# Altium PCB 凌霄核心板插座PCB.PcbDoc
Units mil, origin at the board's own origin, x right, y up, seen from the top; angles counter-clockwise.
Board outline 6000 x 4000 mil, 2 copper layers (Top Layer, Bottom Layer); 1 components, 0 nets, 72 pads, 0 vias.
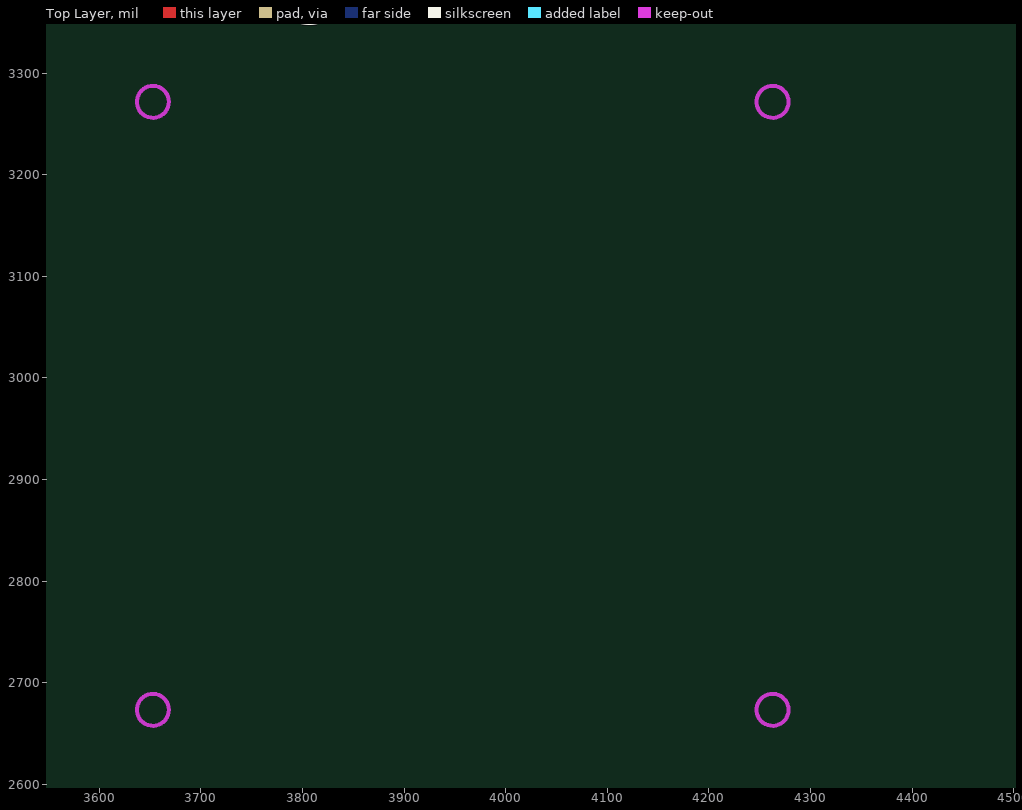
[diagram p0: Top Layer view]
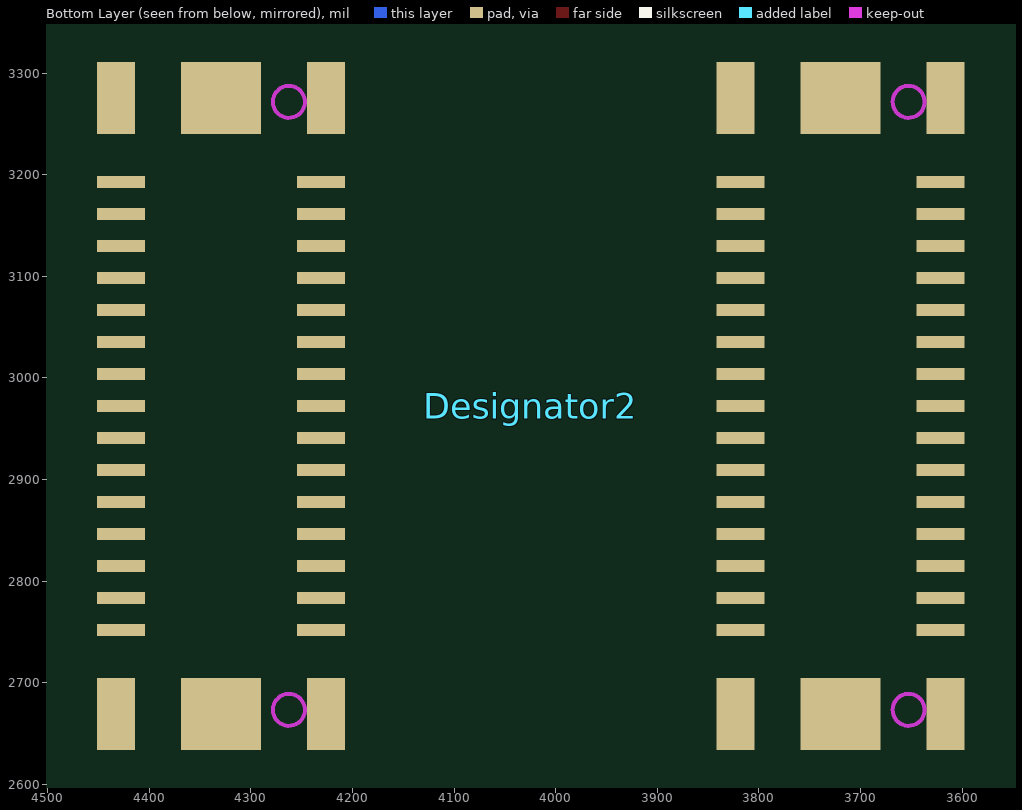
[diagram p1: Bottom Layer view, seen from below]

## Layer stack, top to bottom
Top Solder: solder mask 0.4, Solder Resist, Dk 3.5
Top Layer: signal copper 1.4
Dielectric 1: dielectric 12.6, FR-4, Dk 4.8
Bottom Layer: signal copper 1.4
Bottom Solder: solder mask 0.4, Solder Resist, Dk 3.5

## Board outline
1000,1000 7000,1000 7000,5000 1000,5000

## Design rules (kind name [scope] priority, off if disabled: settings)
Clearance [All] p1: gap=10 ignorepadtopadclearanceinfootprint=FALSE except(0: Arc-Hole Track-Hole SMDPad-Hole THPad-Hole Via-Hole Fill-Hole Poly-Hole Region-Hole Text-Hole)
PolygonConnect [All] p1: connectstyle=Relief reliefconductorwidth=10 reliefentries=4 polygonreliefangle="90 Angle" airgapwidth=10
RoutingVias [All] p1: holewidth=28 width=50 viastyle="Through Hole" minholewidth=28 minwidth=50 maxholewidth=28 maxwidth=50
SolderMaskExpansion [All] p1: expansion=4
Width [All] p1: maxlimit=10 minlimit=10 preferedwidth=10
30 further rules are at their usual default settings.

## Components (designator, comment, footprint, x,y, rotation, side; value= is the part's Value field where it differs from the comment)
Designator2 "Comment" AnoFcMolex_MainBoard 4035,2970 r0 top

## Footprints (in the part's own frame and the unit in brackets; to place one, negate y for a bottom-side part, rotate by r counter-clockwise, add the part's x,y. Pads: shape width x height; smd on the part's side, far side on the other; paste and mask are expansions set on the pad)
AnoFcMolex_MainBoard [mm]
  rect 0.95x1.8 smd far side: 0(-10.637,-7.636) 0(-10.637,7.764) 0(-5.387,-7.636) 0(-5.387,7.764) 0(4.857,-7.636) 0(4.857,7.764) 0(10.107,-7.636) 0(10.107,7.764)
  rect 2x1.8 smd far side: 0(-8.012,-7.636) 0(-8.012,7.764) 0(7.482,-7.636) 0(7.482,7.764)
  rect 1.2x0.3 smd far side: 1(-10.512,5.664) 2(-10.512,4.864) 3(-10.512,4.064) 4(-10.512,3.264) 5(-10.512,2.464) 6(-10.512,1.664) 7(-10.512,0.864) 8(-10.512,0.064) 9(-10.512,-0.736) 10(-10.512,-1.536) 11(-10.512,-2.336) 12(-10.512,-3.136) 13(-10.512,-3.936) 14(-10.512,-4.736) 15(-10.512,-5.536) 16(-5.512,-5.536) 17(-5.512,-4.736) 18(-5.512,-3.936) 19(-5.512,-3.136) 20(-5.512,-2.336) 21(-5.512,-1.536) 22(-5.512,-0.736) 23(-5.512,0.064) 24(-5.512,0.864) 25(-5.512,1.664) 26(-5.512,2.464) 27(-5.512,3.264) 28(-5.512,4.064) 29(-5.512,4.864) 30(-5.512,5.664) 31(4.982,5.664) 32(4.982,4.864) 33(4.982,4.064) 34(4.982,3.264) 35(4.982,2.464) 36(4.982,1.664) 37(4.982,0.864) 38(4.982,0.064) 39(4.982,-0.736) 40(4.982,-1.536) 41(4.982,-2.336) 42(4.982,-3.136) 43(4.982,-3.936) 44(4.982,-4.736) 45(4.982,-5.536) 46(9.982,-5.536) 47(9.982,-4.736) 48(9.982,-3.936) 49(9.982,-3.136) 50(9.982,-2.336) 51(9.982,-1.536) 52(9.982,-0.736) 53(9.982,0.064) 54(9.982,0.864) 55(9.982,1.664) 56(9.982,2.464) 57(9.982,3.264) 58(9.982,4.064) 59(9.982,4.864) 60(9.982,5.664)
  Keep-Out Layer circle w0.1: c-9.712,-7.536 r0.4
  Keep-Out Layer circle w0.1: c-9.712,7.664 r0.4
  Keep-Out Layer circle w0.1: c5.782,-7.536 r0.4
  Keep-Out Layer circle w0.1: c5.782,7.664 r0.4

## Nets (pads, with @x,y where several pads share a name; then routed paths per layer and width w, separated by ;. In a path a pad name is that pad's centre, name@x,y a point inside that pad or via, vN(x,y) a via of type N, cw(c..) or ccw(c..) an arc to the next point about the centre after c; other vN are vias at no path point)
pads on no net: Designator2.0 Designator2.1 Designator2.2 Designator2.3 Designator2.4 Designator2.5 Designator2.6 Designator2.7 Designator2.8 Designator2.9 Designator2.10 Designator2.11 Designator2.12 Designator2.13 Designator2.14 Designator2.15 Designator2.16 Designator2.17 Designator2.18 Designator2.19 Designator2.20 Designator2.21 Designator2.22 Designator2.23 Designator2.24 Designator2.25 Designator2.26 Designator2.27 Designator2.28 Designator2.29 Designator2.30 Designator2.31 Designator2.32 Designator2.33 Designator2.34 Designator2.35 Designator2.36 Designator2.37 Designator2.38 Designator2.39 Designator2.40 Designator2.41 Designator2.42 Designator2.43 Designator2.44 Designator2.45 Designator2.46 Designator2.47 Designator2.48 Designator2.49 Designator2.50 Designator2.51 Designator2.52 Designator2.53 Designator2.54 Designator2.55 Designator2.56 Designator2.57 Designator2.58 Designator2.59 Designator2.60